# EAGLE board eca84_v1 (EAGLE 9.6.2)
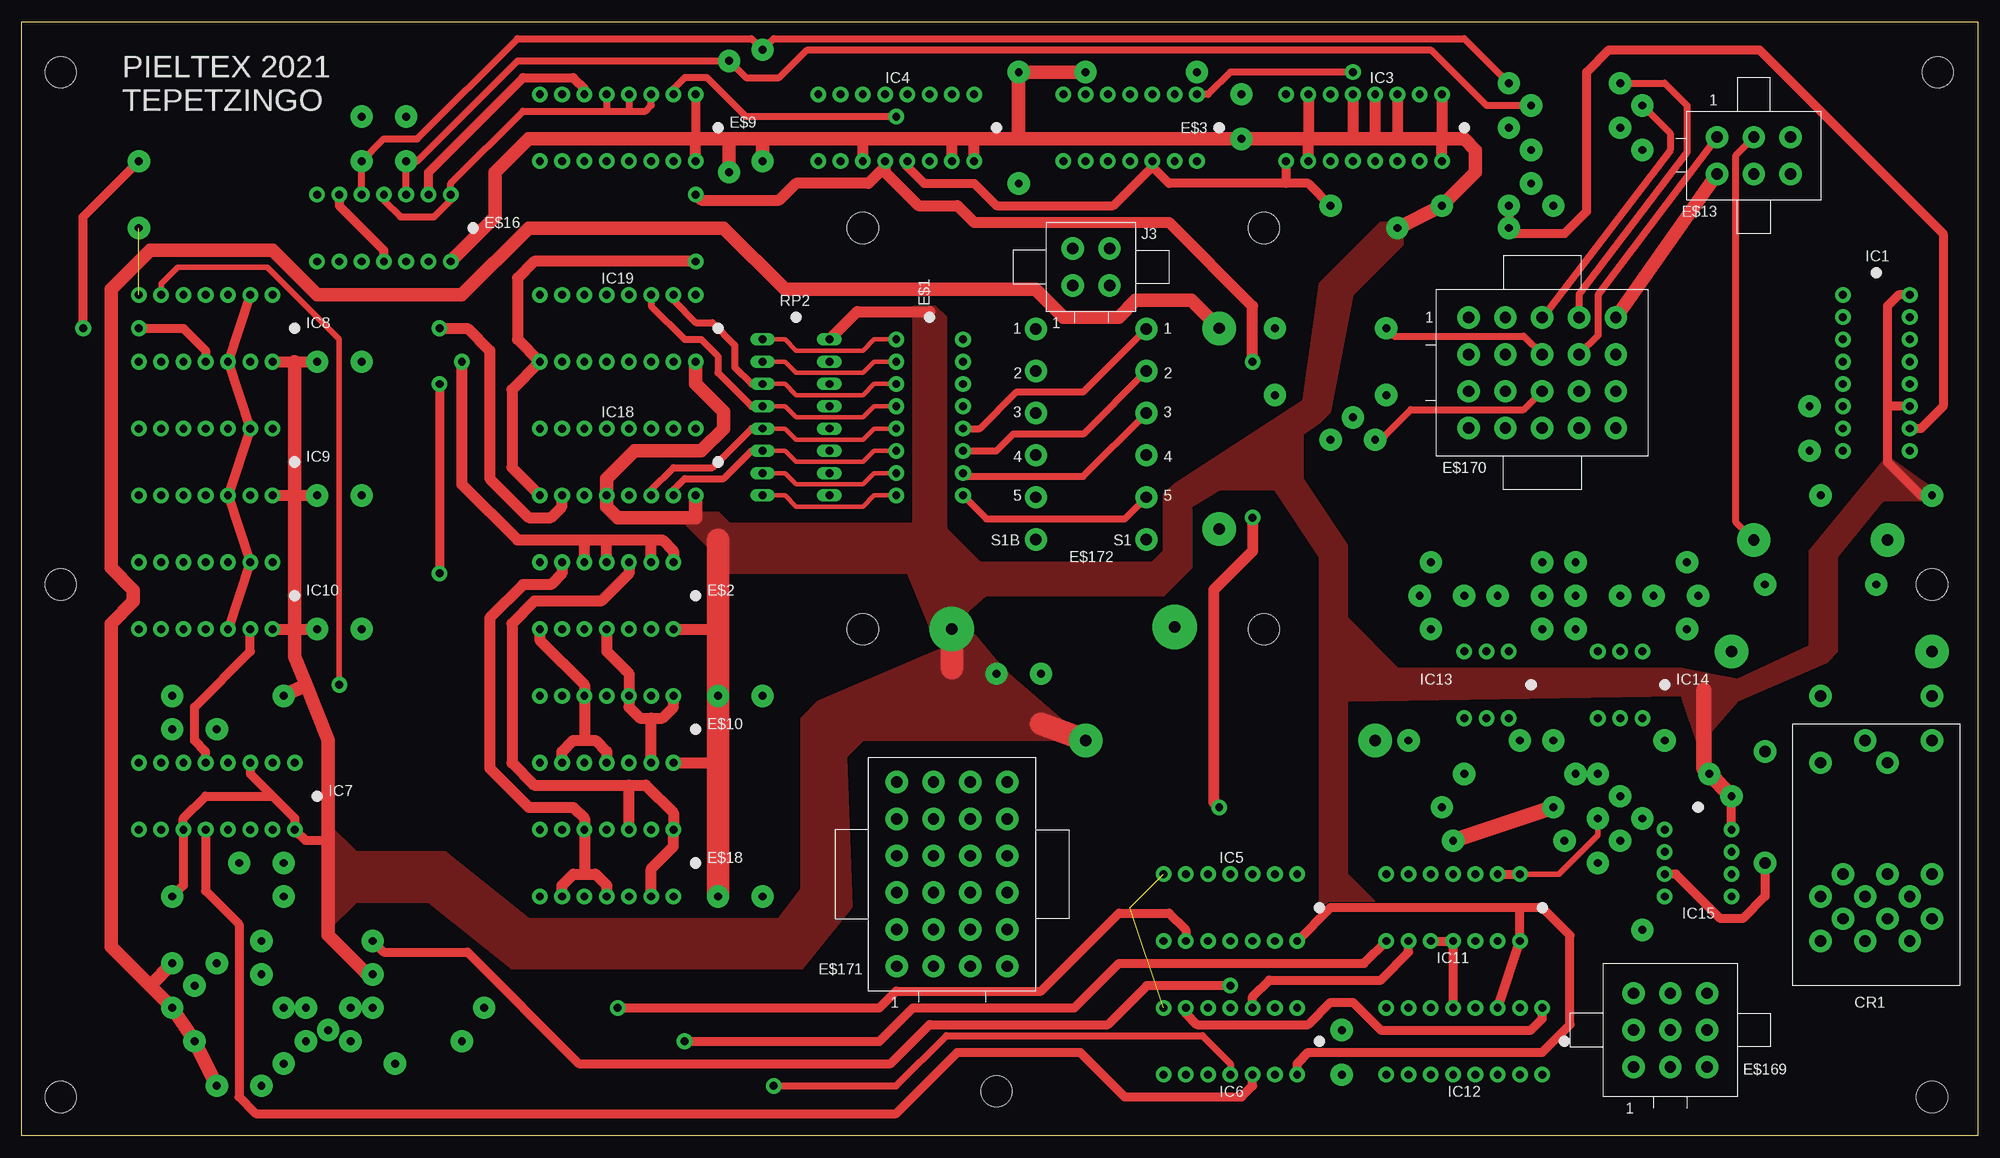
[diagram p0: board, top side]
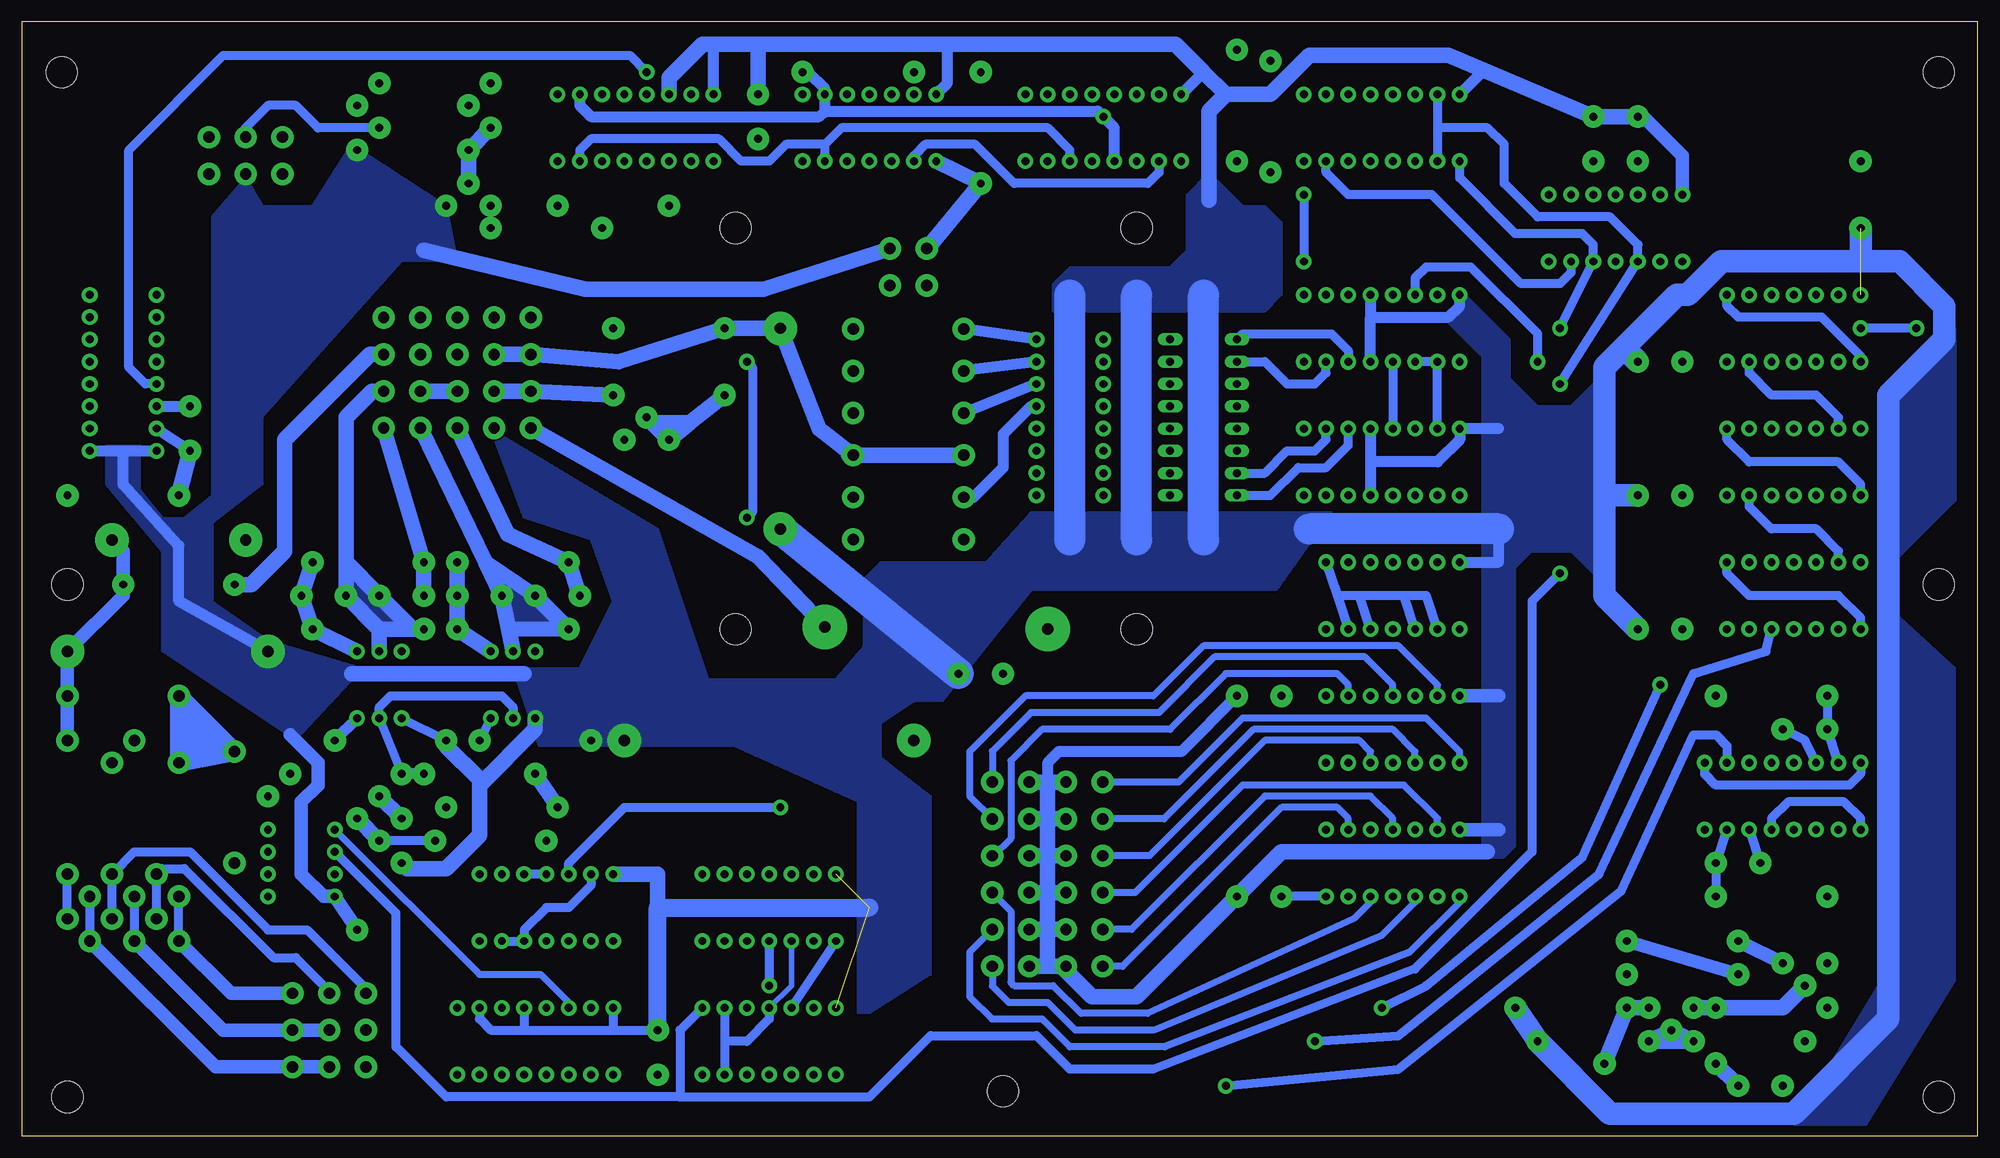
[diagram p1: board, bottom side, seen from below]

Size 223 x 127 mm. Coordinates in mm from the lower left corner, seen from the top.
Outline: 0,127 223,127 223,0 0,0 0,127
Copper layers (1*16): Top 0.035mm / dielectric 1.5mm / Bottom 0.035mm
Design rules "default": minimum track width 6mil, minimum drill 0.35mm, track to track 6mil, track to pad 6mil, pad to pad 6mil, via to via 6mil, smd to smd 6mil, copper to edge 40mil, drill to drill 6mil, minimum pad ring 10mil, minimum via ring 8mil, stop-mask expansion 4mil, vias tented up to drill 0mil, thermal gap 10mil
Holes 3.56 mm at 4.45,121.28 4.45,62.86 4.45,4.44 111.12,5.08 95.89,57.78 141.6,57.78 141.6,103.5 95.89,103.5 218.44,121.28 217.81,62.86 217.81,4.44

## Footprints (pad centres in the part's own frame; a part is rotated, then mirrored left to right if it is on the bottom)
CON-ZIGZAG = drill 1.3 pad 2.54: P$1 -6.35,-11.43; P$2 -1.27,-11.43; P$3 3.81,-11.43; P$4 -3.81,-8.89; P$5 1.27,-8.89; P$6 6.35,-8.89; P$7 -6.35,-6.35; P$8 -1.27,-6.35; P$9 3.81,-6.35; P$10 -3.81,-3.81; P$11 1.27,-3.81; P$12 6.35,-3.81; P$13 -6.35,8.89; P$14 -1.27,11.43; P$15 1.27,8.89; P$16 6.35,11.43
DIL-16 = drill 0.9 pad 1.778: P$1 8.89,3.81; P$2 6.35,3.81; P$3 3.81,3.81; P$4 1.27,3.81; P$5 -1.27,3.81; P$6 -3.81,3.81; P$7 -6.35,3.81; P$8 -8.89,3.81; P$9 -8.89,-3.81; P$10 -6.35,-3.81; P$11 -3.81,-3.81; P$12 -1.27,-3.81; P$13 1.27,-3.81; P$14 3.81,-3.81; P$15 6.35,-3.81; P$16 8.89,-3.81
DIL-14 = drill 0.9 pad 1.778: P$1 7.62,3.81; P$2 5.08,3.81; P$3 2.54,3.81; P$4 0,3.81; P$5 -2.54,3.81; P$6 -5.08,3.81; P$7 -7.62,3.81; P$8 -7.62,-3.81; P$9 -5.08,-3.81; P$10 -2.54,-3.81; P$11 0,-3.81; P$12 2.54,-3.81; P$13 5.08,-3.81; P$14 7.62,-3.81
ROUND-3 = drill 0.9 pad 2.54: P$1 0,0
CON-2X3 = drill 1.3 pad 2.54: P$1 -4.2,2.1; P$2 -4.2,-2.1; P$3 0,2.1; P$4 0,-2.1; P$5 4.2,2.1; P$6 4.2,-2.1
ROUND-5 = drill 1.3 pad 3.81: P$1 0,0
ROUND-6 = drill 1.3 pad 5.08: P$1 0,0
ROUND-1 = drill 0.9 pad 1.778: P$1 0,0
ROUND-4 = drill 1.3 pad 2.54: P$1 0,0
CON-3X3 = drill 1.3 pad 2.54: P$1 -4.2,-4.2; P$2 0,-4.2; P$3 4.2,-4.2; P$4 -4.2,0; P$5 0,0; P$6 4.2,0; P$7 -4.2,4.2; P$8 0,4.2; P$9 4.2,4.2
CON-4X5 = drill 1.3 pad 2.54: P$1 -8.4,6.3; P$2 -8.4,2.1; P$3 -8.4,-2.1; P$4 -8.4,-6.3; P$5 -4.2,6.3; P$6 -4.2,2.1; P$7 -4.2,-2.1; P$8 -4.2,-6.3; P$9 0,6.3; P$10 0,2.1; P$11 0,-2.1; P$12 0,-6.3; P$13 4.2,6.3; P$14 4.2,2.1; P$15 4.2,-2.1; P$16 4.2,-6.3; P$17 8.4,6.3; P$18 8.4,2.1; P$19 8.4,-2.1; P$20 8.4,-6.3
CON-4X6 = drill 1.3 pad 2.54: P$1 -6.3,-10.5; P$2 -2.1,-10.5; P$3 2.1,-10.5; P$4 6.3,-10.5; P$5 -6.3,-6.3; P$6 -2.1,-6.3; P$7 2.1,-6.3; P$8 6.3,-6.3; P$9 -6.3,-2.1; P$10 -2.1,-2.1; P$11 2.1,-2.1; P$12 6.3,-2.1; P$13 -6.3,2.1; P$14 -2.1,2.1; P$15 2.1,2.1; P$16 6.3,2.1; P$17 -6.3,6.3; P$18 -2.1,6.3; P$19 2.1,6.3; P$20 6.3,6.3; P$21 -6.3,10.5; P$22 -2.1,10.5; P$23 2.1,10.5; P$24 6.3,10.5
CON-2X6 = drill 1.3 pad 2.54: P$1 -6.3,12; P$2 6.3,12; P$3 -6.3,7.2; P$4 6.3,7.2; P$5 -6.3,2.4; P$6 6.3,2.4; P$7 -6.3,-2.4; P$8 6.3,-2.4; P$9 -6.3,-7.2; P$10 6.3,-7.2; P$11 -6.3,-12; P$12 6.3,-12
DIL-6 = drill 0.9 pad 1.778: P$1 2.54,3.81; P$2 0,3.81; P$3 -2.54,3.81; P$4 -2.54,-3.81; P$5 0,-3.81; P$6 2.54,-3.81
DIL-8 = drill 0.9 pad 1.778: P$1 3.81,3.81; P$2 1.27,3.81; P$3 -1.27,3.81; P$4 -3.81,3.81; P$5 -3.81,-3.81; P$6 -1.27,-3.81; P$7 1.27,-3.81; P$8 3.81,-3.81
CON-2X2 = drill 1.3 pad 2.54: P$1 -2.1,-2.1; P$2 2.1,-2.1; P$3 -2.1,2.1; P$4 2.1,2.1
DIL-16-LONG = drill 0.9 long: P$1 -3.81,8.89; P$2 -3.81,6.35; P$3 -3.81,3.81; P$4 -3.81,1.27; P$5 -3.81,-1.27; P$6 -3.81,-3.81; P$7 -3.81,-6.35; P$8 -3.81,-8.89; P$9 3.81,-8.89; P$10 3.81,-6.35; P$11 3.81,-3.81; P$12 3.81,-1.27; P$13 3.81,1.27; P$14 3.81,3.81; P$15 3.81,6.35; P$16 3.81,8.89

## Placement (x,y rotation side)
CR1  [CON-ZIGZAG]  211.46,33.65 0 top
E$1  [DIL-16]  103.5,81.91 90 top
E$2  [DIL-14]  66.67,61.59 0 top
E$3  [DIL-14]  126.36,114.93 0 top
E$9  [DIL-16]  67.94,114.93 0 top
E$10  [DIL-14]  66.67,46.35 0 top
E$11  [ROUND-3]  13.34,111.12 0 top
E$12  [ROUND-3]  13.34,103.5 0 top
E$13  [CON-2X3]  197.49,111.76 0 top
E$14  [ROUND-5]  121.28,45.08 0 top
E$15  [ROUND-6]  131.44,58.04 0 top
E$16  [DIL-14]  41.27,103.5 0 top
E$17  [ROUND-1]  13.34,92.07 0 top
E$18  [DIL-14]  66.67,31.11 0 top
E$19  [ROUND-1]  6.99,92.07 0 top
E$20  [ROUND-3]  33.66,88.26 0 top
E$21  [ROUND-3]  38.73,88.26 0 top
E$22  [ROUND-3]  33.66,73.02 0 top
E$23  [ROUND-3]  38.73,73.02 0 top
E$24  [ROUND-3]  33.66,57.78 0 top
E$25  [ROUND-3]  38.73,57.78 0 top
E$26  [ROUND-3]  22.23,46.35 0 top
E$27  [ROUND-3]  17.14,46.35 0 top
E$28  [ROUND-3]  17.14,50.16 0 top
E$29  [ROUND-3]  29.84,50.16 0 top
E$30  [ROUND-3]  24.77,31.11 0 top
E$31  [ROUND-3]  29.84,31.11 0 top
E$32  [ROUND-3]  29.84,27.3 0 top
E$33  [ROUND-3]  17.14,27.3 0 top
E$34  [ROUND-3]  17.14,19.68 0 top
E$35  [ROUND-3]  22.23,19.68 0 top
E$36  [ROUND-3]  19.68,17.14 0 top
E$37  [ROUND-3]  17.14,14.6 0 top
E$38  [ROUND-3]  19.68,10.79 0 top
E$39  [ROUND-3]  22.23,5.71 0 top
E$40  [ROUND-3]  27.3,5.71 0 top
E$41  [ROUND-3]  29.84,8.25 0 top
E$42  [ROUND-3]  29.84,14.6 0 top
E$43  [ROUND-3]  32.38,14.6 0 top
E$44  [ROUND-3]  32.38,10.79 0 top
E$45  [ROUND-3]  34.92,12.06 0 top
E$46  [ROUND-3]  37.47,10.79 0 top
E$47  [ROUND-3]  37.47,14.6 0 top
E$48  [ROUND-3]  40.01,14.6 0 top
E$49  [ROUND-3]  42.55,8.25 0 top
E$50  [ROUND-3]  50.16,10.79 0 top
E$51  [ROUND-3]  52.7,14.6 0 top
E$52  [ROUND-3]  27.3,18.41 0 top
E$53  [ROUND-3]  27.3,22.22 0 top
E$54  [ROUND-3]  40.01,18.41 0 top
E$55  [ROUND-3]  40.01,22.22 0 top
E$56  [ROUND-1]  47.62,64.13 0 top
E$57  [ROUND-1]  47.62,85.72 0 top
E$58  [ROUND-1]  47.62,92.07 0 top
E$59  [ROUND-1]  50.16,88.26 0 top
E$60  [ROUND-1]  76.83,99.69 0 top
E$61  [ROUND-1]  76.83,107.31 0 top
E$62  [ROUND-3]  38.73,111.12 0 top
E$63  [ROUND-3]  43.81,111.12 0 top
E$64  [ROUND-3]  43.81,116.2 0 top
E$65  [ROUND-3]  38.73,116.2 0 top
E$66  [ROUND-3]  80.64,122.55 0 top
E$67  [ROUND-3]  84.45,123.82 0 top
E$68  [ROUND-3]  113.67,121.28 0 top
E$69  [ROUND-3]  121.28,121.28 0 top
E$70  [ROUND-3]  133.99,121.28 0 top
E$71  [ROUND-3]  139.06,118.74 0 top
E$72  [ROUND-3]  169.54,120.01 0 top
E$73  [ROUND-3]  172.09,117.47 0 top
E$74  [ROUND-3]  169.54,114.93 0 top
E$75  [ROUND-3]  172.09,112.39 0 top
E$76  [ROUND-3]  172.09,108.58 0 top
E$77  [ROUND-3]  174.62,106.04 0 top
E$78  [ROUND-3]  169.54,106.04 0 top
E$79  [ROUND-3]  169.54,103.5 0 top
E$80  [ROUND-3]  161.93,106.04 0 top
E$81  [ROUND-3]  156.84,103.5 0 top
E$82  [ROUND-3]  149.22,106.04 0 top
E$83  [ROUND-3]  139.06,113.66 0 top
E$84  [ROUND-3]  142.88,92.07 0 top
E$85  [ROUND-3]  155.57,92.07 0 top
E$86  [ROUND-3]  142.88,84.45 0 top
E$87  [ROUND-3]  155.57,84.45 0 top
E$88  [ROUND-3]  151.76,81.91 0 top
E$89  [ROUND-3]  154.31,79.37 0 top
E$90  [ROUND-3]  149.22,79.37 0 top
E$91  [ROUND-3]  79.38,27.3 0 top
E$92  [ROUND-3]  84.45,27.3 0 top
E$93  [ROUND-3]  79.38,50.16 0 top
E$94  [ROUND-3]  84.45,50.16 0 top
E$95  [ROUND-3]  80.64,109.85 0 top
E$96  [ROUND-3]  84.45,111.12 0 top
E$97  [ROUND-1]  67.94,14.6 0 top
E$98  [ROUND-1]  75.56,10.79 0 top
E$99  [ROUND-1]  85.72,5.71 0 top
E$100  [ROUND-3]  111.12,52.7 0 top
E$102  [ROUND-3]  184.78,23.49 0 top
E$103  [ROUND-3]  179.71,31.11 0 top
E$104  [ROUND-3]  182.25,33.65 0 top
E$105  [ROUND-3]  184.78,36.19 0 top
E$106  [ROUND-3]  179.71,36.19 0 top
E$107  [ROUND-3]  182.25,38.73 0 top
E$108  [ROUND-3]  175.9,33.65 0 top
E$109  [ROUND-3]  174.62,37.46 0 top
E$110  [ROUND-3]  163.19,33.65 0 top
E$111  [ROUND-3]  161.93,37.46 0 top
E$112  [ROUND-3]  164.47,41.27 0 top
E$113  [ROUND-3]  177.16,41.27 0 top
E$114  [ROUND-3]  179.71,41.27 0 top
E$115  [ROUND-3]  174.62,45.08 0 top
E$116  [ROUND-3]  170.81,45.08 0 top
E$117  [ROUND-3]  158.12,45.08 0 top
E$118  [ROUND-3]  160.66,57.78 0 top
E$119  [ROUND-3]  159.38,61.59 0 top
E$120  [ROUND-3]  160.66,65.4 0 top
E$121  [ROUND-3]  164.47,61.59 0 top
E$122  [ROUND-3]  168.28,61.59 0 top
E$123  [ROUND-3]  173.35,61.59 0 top
E$124  [ROUND-3]  177.16,61.59 0 top
E$125  [ROUND-3]  177.16,65.4 0 top
E$126  [ROUND-3]  173.35,65.4 0 top
E$127  [ROUND-3]  173.35,57.78 0 top
E$128  [ROUND-3]  177.16,57.78 0 top
E$129  [ROUND-3]  182.25,61.59 0 top
E$130  [ROUND-3]  186.06,61.59 0 top
E$131  [ROUND-3]  189.87,65.4 0 top
E$132  [ROUND-3]  191.13,61.59 0 top
E$133  [ROUND-3]  189.87,57.78 0 top
E$134  [ROUND-3]  198.75,62.86 0 top
E$135  [ROUND-3]  203.84,78.1 0 top
E$136  [ROUND-3]  203.84,83.18 0 top
E$137  [ROUND-3]  205.1,73.02 0 top
E$138  [ROUND-3]  217.81,73.02 0 top
E$139  [ROUND-3]  211.46,62.86 0 top
E$140  [ROUND-3]  182.25,120.01 0 top
E$141  [ROUND-3]  184.78,117.47 0 top
E$142  [ROUND-3]  182.25,114.93 0 top
E$143  [ROUND-3]  184.78,112.39 0 top
E$144  [ROUND-5]  136.53,92.07 0 top
E$145  [ROUND-1]  36.2,51.43 0 top
E$146  [ROUND-1]  137.79,17.14 0 top
E$147  [ROUND-3]  150.5,12.06 0 top
E$148  [ROUND-3]  150.5,6.98 0 top
E$149  [ROUND-1]  99.69,116.2 0 top
E$150  [ROUND-1]  140.34,88.26 0 top
E$151  [ROUND-1]  151.76,121.28 0 top
E$152  [ROUND-3]  192.41,41.27 0 top
E$153  [ROUND-3]  194.94,38.73 0 top
E$154  [ROUND-3]  187.32,45.08 0 top
E$155  [ROUND-4]  198.75,31.11 0 top
E$156  [ROUND-4]  198.75,43.81 0 top
E$157  [ROUND-4]  205.1,50.16 0 top
E$158  [ROUND-4]  217.81,50.16 0 top
E$159  [ROUND-5]  217.81,55.24 0 top
E$160  [ROUND-5]  212.72,67.94 0 top
E$161  [ROUND-5]  194.94,55.24 0 top
E$162  [ROUND-5]  197.49,67.94 0 top
E$163  [ROUND-5]  154.31,45.08 0 top
E$164  [ROUND-1]  140.34,70.48 0 top
E$165  [ROUND-1]  136.53,37.46 0 top
E$166  [ROUND-5]  136.53,69.21 0 top
E$167  [ROUND-6]  106.05,57.78 0 top
E$168  [ROUND-3]  113.67,108.58 0 top
E$169  [CON-3X3]  187.96,12.06 0 top
E$170  [CON-4X5]  173.35,86.99 0 top
E$171  [CON-4X6]  106.05,29.84 0 top
E$172  [CON-2X6]  121.92,80.01 0 top
GND  [ROUND-3]  116.2,52.7 0 top
IC1  [DIL-16]  211.46,86.99 90 top
IC3  [DIL-16]  153.03,114.93 0 top
IC4  [DIL-16]  99.69,114.93 0 top
IC5  [DIL-14]  137.79,26.03 0 top
IC6  [DIL-14]  137.79,10.79 0 top
IC7  [DIL-16]  22.23,38.73 0 top
IC8  [DIL-14]  20.95,92.07 0 top
IC9  [DIL-14]  20.95,76.83 0 top
IC10  [DIL-14]  20.95,61.59 0 top
IC11  [DIL-14]  163.19,26.03 0 top
IC12  [DIL-16]  164.47,10.79 0 top
IC13  [DIL-6]  167,51.43 0 top
IC14  [DIL-6]  182.25,51.43 0 top
IC15  [DIL-8]  191.13,31.11 90 top
IC18  [DIL-16]  67.94,76.83 0 top
IC19  [DIL-16]  67.94,92.07 0 top
J3  [CON-2X2]  121.92,99.06 0 top
RP2  [DIL-16-LONG]  88.27,81.91 0 top

## Library data of the parts
CR1 E$1-E$3 E$9-E$100 E$102-E$172 GND IC1 IC3-IC15 IC18 IC19 J3 RP2 = eca84

## Nets
GND: E$2.P$7 E$3.P$7 E$9.P$8 E$10.P$7 E$12.P$1 E$13.P$4 E$16.P$7 E$18.P$7 E$21.P$1 E$23.P$1 E$25.P$1 E$50.P$1 E$51.P$1 E$64.P$1 E$65.P$1 E$71.P$1 E$77.P$1 E$92.P$1 E$94.P$1 E$102.P$1 E$103.P$1 E$115.P$1 E$117.P$1 E$143.P$1 E$147.P$1 E$161.P$1 E$163.P$1 E$166.P$1 E$171.P$2 E$171.P$3 E$171.P$6 E$171.P$7 E$171.P$10 E$171.P$11 E$171.P$14 E$171.P$15 E$171.P$18 E$171.P$19 E$171.P$22 E$171.P$23 GND.P$1 IC1.P$8 IC1.P$9 IC3.P$6 IC3.P$8 IC4.P$8 IC5.P$7 IC6.P$7 IC8.P$7 IC11.P$7 IC12.P$2 IC12.P$4 IC12.P$8 IC13.P$4 IC14.P$4 IC15.P$4 IC18.P$4 IC18.P$8 IC18.P$13 IC19.P$4 IC19.P$8 IC19.P$13 J3.P$4
GRUPO1: E$118.P$1 E$121.P$1 E$122.P$1 E$170.P$16 IC13.P$2
GRUPO2: E$128.P$1 E$129.P$1 E$130.P$1 E$170.P$19 IC14.P$2
S$1: E$2.P$11 E$10.P$1 E$10.P$3 E$10.P$13
S$2: E$11.P$1 E$17.P$1 E$19.P$1 IC8.P$11
S$3: E$3.P$13 IC3.P$15 IC4.P$14
S$4: E$16.P$6 E$16.P$11
S$5: E$97.P$1 E$145.P$1 IC5.P$9 IC8.P$6
S$6: IC7.P$5 IC10.P$13
S$7: E$52.P$1 E$55.P$1 E$146.P$1 IC5.P$11
S$8: IC8.P$1 IC8.P$8
S$9: E$99.P$1 IC6.P$11 IC7.P$2
S$10: IC6.P$12 IC7.P$12
S$11: E$36.P$1 E$42.P$1 E$43.P$1
S$12: E$47.P$1 E$48.P$1 E$49.P$1
S$13: E$86.P$1 E$88.P$1 E$90.P$1
S$14: CR1.P$3 CR1.P$9 E$169.P$2 E$169.P$3
S$15: E$16.P$5 E$62.P$1 E$67.P$1 E$72.P$1
S$16: E$16.P$3 E$63.P$1 E$66.P$1 E$73.P$1
S$17: E$9.P$6 E$16.P$2
S$18: E$9.P$3 E$9.P$4 E$9.P$5 E$16.P$1 E$16.P$4
S$19: IC18.P$7 IC19.P$10 IC19.P$11
S$20: E$74.P$1 E$75.P$1 E$76.P$1
S$21: IC5.P$10 IC6.P$2 IC6.P$4 IC6.P$13
S$22: E$2.P$1 E$2.P$2 E$2.P$4 E$2.P$5 E$2.P$9 E$2.P$10 E$2.P$12 E$2.P$13 E$59.P$1 IC19.P$6
S$23: E$3.P$12 E$82.P$1 IC3.P$9 IC4.P$13
S$24: E$9.P$9 E$16.P$12 E$58.P$1 IC18.P$10
S$25: IC5.P$8 IC6.P$5
S$26: E$1.P$3 IC19.P$2 RP2.P$3
S$27: E$1.P$4 IC19.P$3 RP2.P$4
S$28: E$1.P$6 IC18.P$15 RP2.P$6
S$29: E$1.P$7 IC18.P$2 RP2.P$7
S$30: IC8.P$13 IC9.P$6
S$31: E$1.P$1 IC19.P$14 RP2.P$1
S$32: E$1.P$2 IC19.P$15 RP2.P$2
S$33: E$1.P$5 IC18.P$14 RP2.P$5
S$34: E$1.P$8 IC18.P$3 RP2.P$8
S$35: E$98.P$1 IC8.P$2 IC8.P$12 IC9.P$2 IC9.P$12 IC10.P$2 IC10.P$12 IC11.P$8
S$36: E$1.P$12 E$172.P$2
S$37: E$2.P$8 E$10.P$5 E$10.P$9 E$10.P$11
S$38: E$2.P$6 E$18.P$5 E$18.P$9 E$18.P$11
S$39: IC6.P$3 IC11.P$9
S$40: E$2.P$3 E$18.P$1 E$18.P$3 E$18.P$13
S$41: IC18.P$5 IC19.P$12
S$42: E$3.P$1 E$151.P$1 IC1.P$5
S$43: E$78.P$1 E$79.P$1 IC1.P$10
S$44: IC6.P$6 IC12.P$1
S$45: IC5.P$14 IC6.P$14 IC11.P$14 IC12.P$3
S$46: IC11.P$10 IC11.P$11 IC12.P$5
S$47: E$155.P$1 IC15.P$3
S$48: IC9.P$1 IC9.P$8
S$49: E$106.P$1 E$107.P$1 IC11.P$1 IC11.P$2
S$50: E$109.P$1 E$110.P$1
S$52: IC9.P$13 IC10.P$6
S$53: IC10.P$1 IC10.P$8
S$54: E$27.P$1 E$28.P$1 IC7.P$7
S$55: E$26.P$1 IC7.P$6
S$56: IC7.P$9 IC7.P$13
S$57: IC7.P$1 IC7.P$8
S$58: E$30.P$1 IC7.P$14
S$59: E$31.P$1 E$32.P$1 IC7.P$15
S$60: E$35.P$1 E$53.P$1
S$61: E$44.P$1 E$45.P$1 E$46.P$1
S$62: E$40.P$1 E$41.P$1
S$65: E$3.P$2 E$9.P$2 E$60.P$1 E$61.P$1 E$70.P$1 E$149.P$1 E$150.P$1 E$164.P$1 E$165.P$1 IC3.P$2 IC4.P$12 IC11.P$5 IC18.P$9 IC19.P$9
S$66: E$3.P$9 IC4.P$10
S$67: E$3.P$8 E$168.P$1 J3.P$3
S$68: E$9.P$15 E$16.P$13
S$69: E$18.P$8 E$171.P$8
S$70: E$1.P$11 E$172.P$4
S$71: E$1.P$10 E$172.P$6
S$72: E$1.P$9 E$172.P$10
S$73: E$141.P$1 E$170.P$9
S$74: E$140.P$1 E$170.P$13
S$75: E$13.P$2 E$170.P$17
S$76: E$13.P$1 E$170.P$14
S$77: E$85.P$1 E$170.P$10
S$78: E$89.P$1 E$170.P$11 E$170.P$15
S$79: E$13.P$3 E$142.P$1 E$162.P$1
S$80: E$10.P$6 E$171.P$20
S$81: E$10.P$4 E$171.P$24
S$82: E$10.P$2 E$171.P$16
S$83: E$10.P$10 E$171.P$17
S$84: E$10.P$12 E$171.P$13
S$85: E$10.P$8 E$171.P$21
S$86: IC12.P$6 IC15.P$1
S$87: E$18.P$6 E$171.P$9
S$88: E$18.P$4 E$171.P$5
S$89: E$18.P$2 E$171.P$1
S$90: E$18.P$10 E$171.P$4
S$91: E$18.P$12 E$171.P$12
S$92: E$9.P$7 E$9.P$10 E$16.P$10 E$56.P$1 E$57.P$1 IC6.P$1 IC15.P$2
S$93: IC11.P$6 IC11.P$12 IC11.P$13
S$94: IC11.P$3 IC11.P$4
S$95: CR1.P$6 CR1.P$12
S$96: E$116.P$1 IC13.P$6
S$97: E$136.P$1 IC1.P$6
S$98: E$113.P$1 E$114.P$1 IC13.P$5 IC14.P$5
S$99: E$154.P$1 IC14.P$6
S$100: E$104.P$1 E$105.P$1 E$108.P$1
S$101: E$111.P$1 E$112.P$1
S$102: CR1.P$5 CR1.P$11 E$169.P$7
S$103: CR1.P$2 CR1.P$8 E$169.P$5 E$169.P$6
S$104: CR1.P$1 CR1.P$7 E$169.P$9
S$105: CR1.P$4 CR1.P$10 E$169.P$8
S$106: CR1.P$16 E$139.P$1 E$158.P$1 E$159.P$1 E$160.P$1
S$107: CR1.P$13 E$156.P$1 E$157.P$1
S$109: E$135.P$1 E$137.P$1 IC1.P$7
S$110: E$134.P$1 E$170.P$18
S$111: E$131.P$1 E$132.P$1 E$133.P$1 IC14.P$1
S$112: E$123.P$1 E$126.P$1 E$127.P$1 IC13.P$1
S$113: E$119.P$1 E$120.P$1 E$170.P$12
S$114: E$34.P$1 E$37.P$1 E$38.P$1 E$39.P$1 E$84.P$1 E$144.P$1 E$170.P$2 E$170.P$6 E$172.P$7 E$172.P$8
S$115: E$1.P$16 E$172.P$1
S$116: E$1.P$15 E$172.P$3
S$117: E$1.P$14 E$172.P$5
S$118: E$1.P$13 E$172.P$9
S$119: E$15.P$1 E$170.P$4
S$121: E$124.P$1 E$125.P$1 E$170.P$20
S$122: E$87.P$1 E$170.P$3 E$170.P$7
VCC: E$2.P$14 E$9.P$1 E$9.P$16 E$10.P$14 E$14.P$1 E$16.P$14 E$18.P$14 E$20.P$1 E$22.P$1 E$24.P$1 E$29.P$1 E$33.P$1 E$54.P$1 E$68.P$1 E$69.P$1 E$80.P$1 E$81.P$1 E$83.P$1 E$91.P$1 E$93.P$1 E$95.P$1 E$96.P$1 E$100.P$1 E$138.P$1 E$152.P$1 E$153.P$1 E$167.P$1 IC1.P$11 IC1.P$16 IC3.P$1 IC3.P$3 IC3.P$4 IC3.P$5 IC3.P$7 IC3.P$10 IC3.P$16 IC4.P$11 IC4.P$15 IC4.P$16 IC7.P$3 IC7.P$11 IC7.P$16 IC8.P$14 IC9.P$14 IC10.P$14 IC15.P$8 IC18.P$12 IC18.P$16 IC19.P$16 RP2.P$16

## Tracks (layer width: path | path; a pad name or v marks a point on that pad's centre or on a via)
GND  (3 unrouted)
  Bottom 1.016: IC14.P$4 E$115.P$1 | IC12.P$2 170.81,13.33 169.54,12.06 165.74,12.06 | 165.74,12.06 155.57,12.06 | 155.57,12.06 E$147.P$1 | IC12.P$4 165.74,12.06 | IC12.P$8 155.57,12.06
  Bottom 1.27: E$2.P$7 54.61,65.4 54.61,69.21 | E$94.P$1 90.81,43.81 104.78,43.81 106.05,42.54 106.05,40.34 | IC1.P$9 211.46,78.1 | 211.46,78.1 IC1.P$8 | E$9.P$8 56.49,121.31 55.87,121.31 | IC3.P$8 144.15,124.46 | E$3.P$7 117.47,120.01 117.47,124.46 | IC4.P$8 88.27,121.28 | IC19.P$8 59.05,94.61 60.33,93.34 69.22,93.34 | IC19.P$4 69.22,93.34 | IC19.P$13 69.22,93.34 | IC18.P$4 69.22,76.83 | 69.22,76.83 IC18.P$13 | 69.22,76.83 61.59,76.83 59.05,79.37 IC18.P$8 54.61,80.64 | E$161.P$1 205.1,60.96 205.1,67.31 211.46,74.29 211.46,78.1
  Bottom 1.524: E$10.P$7 54.61,50.16 | E$18.P$7 54.61,34.92 | E$102.P$1 IC15.P$4 188.59,27.3 191.13,29.84 191.13,38.1 189.23,40 189.23,42.54 192.41,45.72 | E$16.P$7 33.66,111.76 38.1,116.2 E$65.P$1
  Bottom 1.778: 55.88,32.38 79.38,32.38 E$92.P$1 95.89,15.87 100.97,15.87 103.94,18.85 E$171.P$2 106.05,19.34 | E$171.P$22 106.05,40.34 | E$171.P$23 106.05,40.34 | E$171.P$18 106.05,36.14 | E$171.P$19 106.05,36.14 | 106.05,19.34 E$171.P$3 | E$171.P$6 106.05,23.54 | E$171.P$7 106.05,23.54 | E$171.P$10 106.05,27.74 | E$171.P$11 106.05,27.74 | E$171.P$15 106.05,31.94 | E$171.P$14 106.05,31.94 | 106.05,40.34 106.05,36.14 | 106.05,36.14 106.05,31.94 | 106.05,31.94 106.05,27.74 | 106.05,27.74 106.05,23.54 | 106.05,23.54 106.05,19.34 | IC11.P$7 150.5,29.84 150.5,26.03 | E$65.P$1 E$64.P$1 55.87,121.31 60.33,123.19 76.2,123.19 80.64,118.74 85.72,118.74 | 85.72,118.74 88.27,121.28 91.44,124.46 117.47,124.46 139.06,124.46 | 139.06,124.46 144.15,124.46 145.41,124.46 149.22,120.65 IC3.P$6 | E$71.P$1 139.06,124.46 | 85.72,118.74 87.63,116.84 87.63,106.68 | 165.74,52.7 185.42,52.7 | E$103.P$1 179.07,30.48 174.62,30.48 170.81,34.29 170.81,40 | 170.81,40 170.81,40.64 174.62,44.45 E$115.P$1 | 170.81,40 164.47,46.35 IC13.P$4 | J3.P$4 138.43,96.52 158.75,96.52 177.16,100.96
  Bottom 2.032: E$147.P$1 150.5,26.03 126.36,26.03
  Bottom 2.54: E$25.P$1 42.55,61.59 42.55,73.02 | 42.55,73.02 E$23.P$1 | 42.55,73.02 42.55,87.63 40.32,89.85 | 40.32,89.85 34.29,95.88 33.02,95.88 29.21,99.69 13.34,99.69 | E$12.P$1 13.34,99.69 | E$21.P$1 40.32,89.85 | 13.34,99.69 8.89,99.69 3.81,94.61 3.81,90.8 10.16,84.45 10.16,13.33 20.95,2.54 41.91,2.54 E$50.P$1 E$51.P$1
  Bottom 3.556: 54.61,69.21 76.2,69.21 | 88.27,67.94 88.27,95.88 | 95.89,67.94 95.89,95.88 | 103.5,67.94 103.5,95.88 | E$166.P$1 GND.P$1
  pour Bottom (no thermals): 41.91,87.63 46.35,83.18 50.16,83.18 53.34,86.36 53.34,90.8 58.42,95.88 60.96,93.34 56.52,88.9 56.52,31.75 53.98,31.75 52.7,33.02 52.7,64.77 50.8,66.67 46.35,66.67 41.91,62.23
  pour Bottom: 2.54,72.39 10.16,64.77 10.16,84.45 2.54,92.07
  pour Bottom: 10.16,60.32 10.16,18.67 10.16,18.67
  pour Bottom: 10.16,60.32 10.16,19.05 20.95,1.27 12.7,1.27 2.54,17.78 2.54,53.34
  pour Bottom (no thermals): 127.64,13.97 127.64,38.1 141.75,44.45 164.04,44.45 167,53.34 159.38,53.34 155.57,60.96 158.12,67.94 165.74,70.48 169.54,80.64 150.5,69.21 144.78,52.07 130.18,52.07 127,55.77 127,63.5 125.09,65.4 113.09,65.4 107.95,71.12 73.66,71.12 80.01,62.23 107.95,62.23 118.11,49.53 121.28,49.53 125.09,46.99 125.09,43.18 119.38,38.73 119.38,18.41 126.36,13.97
  pour Bottom: 81.28,93.98 105.41,93.98 105.41,97.15 103.5,99.06 92.08,99.06 90.17,100.96 90.17,107.31 87.63,109.85 83.82,106.04 81.28,106.04 79.38,104.14 79.38,95.88
  pour Bottom (no thermals): 197.49,109.22 195.58,106.04 189.87,106.04 185.42,113.03 174.62,106.04 173.35,99.69 179.71,99.69 195.58,81.91 195.58,74.29 201.29,69.85 201.29,60.96 194.94,56.51 184.15,53.34 191.77,45.08 207.01,55.24 207.01,66.67 213.36,74.29 213.36,78.74 209.55,78.74 209.55,73.66 207.01,70.48 204.47,70.48 201.29,73.02 201.29,104.77
GRUPO1
  Bottom 1.778: E$170.P$16 170.14,65.43 | 170.14,65.43 E$122.P$1 167.52,57.81 | 167.52,57.81 IC13.P$2 | 167.52,57.81 E$118.P$1 E$121.P$1 170.14,65.43
  pour Bottom (no thermals): 161.93,58.42 168.28,64.13 167,58.42
GRUPO2
  Bottom 1.778: E$170.P$19 183.07,84.89 186.06,81.91 186.06,65.4 | 186.06,65.4 E$130.P$1 182.25,57.78 | IC14.P$2 182.25,57.78 | 178.44,57.78 E$129.P$1 186.06,65.4 | 178.44,57.78 E$128.P$1 | 182.25,57.78 178.44,57.78
  pour Bottom (no thermals): 179.71,58.42 185.42,64.13 185.42,61.59 182.25,58.42
S$1
  Top 1.27: E$2.P$11 66.67,55.24 69.22,52.7 E$10.P$3 69.22,48.89 70.48,47.62 71.75,47.62 | E$10.P$1 74.3,48.89 73.03,47.62 71.75,47.62 | E$10.P$13 71.75,47.62
S$2
  Top 1.016: E$19.P$1 6.99,104.77 E$11.P$1 | E$17.P$1 18.41,92.07 20.95,89.53 IC8.P$11
  Bottom 1.016: E$19.P$1 E$17.P$1
S$3
  Bottom 1.016: IC4.P$14 103.5,112.39 106.02,114.91 129.56,114.91 131.44,113.03 | 131.44,113.03 135.89,113.03 137.79,111.12 140.97,111.12 143.51,113.66 158.12,113.66 159.38,112.39 IC3.P$15 | E$3.P$13 131.44,113.03
S$4
  Top 1.016: E$16.P$6 36.2,106.04 41.27,100.96 E$16.P$11
S$5
  Top 0.61: IC8.P$6 15.88,97.15 17.78,99.06 27.94,99.06 36.2,90.8 E$145.P$1
  Top 1.016: E$97.P$1 97.79,14.6 99.69,16.51 116.2,16.51 125.09,25.4 130.81,25.4 132.72,23.49 IC5.P$9
  Bottom 1.016: E$97.P$1 62.87,17.14 45.09,31.75 E$145.P$1
S$6
  Top 1.016: IC7.P$5 20.95,43.81 19.68,45.08 19.68,48.89 26.04,55.24 IC10.P$13
S$7
  Top 1.016: E$55.P$1 41.27,20.95 50.8,20.95 63.5,8.25 99.06,8.25 103.5,12.7 123.83,12.7 128.27,17.14 E$146.P$1
  Bottom 1.016: IC5.P$11 E$146.P$1
  Bottom 1.524: E$52.P$1 E$55.P$1
S$8
  Bottom 1.016: IC8.P$8 13.34,88.9 17.78,93.34 27.3,93.34 28.57,94.61 IC8.P$1
S$9
  Top 0.813: E$99.P$1 99.69,5.71 105.41,11.43 134.62,11.43 137.79,8.25 IC6.P$11
  Bottom 1.016: E$99.P$1 66.04,7.62 40.64,27.94 32.38,45.72 29.84,45.72 28.57,44.45 IC7.P$2
S$10
  Top 1.016: IC7.P$12 20.95,27.94 24.77,24.13 24.77,4.44 26.67,2.54 99.69,2.54 106.68,9.52 120.65,9.52 125.73,4.44 139.06,4.44 140.34,5.71 IC6.P$12
S$11
  Bottom 1.778: E$43.P$1 E$42.P$1 22.23,14.6 E$36.P$1
S$12
  Bottom 1.778: E$47.P$1 E$48.P$1 E$49.P$1
S$13
  Bottom 1.778: E$86.P$1 146.84,81.28 | 146.84,81.28 E$90.P$1 E$88.P$1 151.13,81.28 146.84,81.28
S$14
  Bottom 1.016: CR1.P$9 CR1.P$3
  Bottom 1.524: E$169.P$2 E$169.P$3 200.91,7.86 CR1.P$3
S$15
  Top 0.813: E$16.P$5 E$62.P$1 41.27,113.66 45.09,113.66 56.52,125.09 83.19,125.09 E$67.P$1 85.72,125.09 164.47,125.09 E$72.P$1
S$16
  Top 0.813: E$16.P$3 E$63.P$1 45.09,111.12 56.52,122.55 E$66.P$1 82.55,120.65 86.36,120.65 89.53,123.82 160.66,123.82 167,117.47 E$73.P$1
S$17
  Top 1.016: E$16.P$2 46.35,109.85 57.15,120.65 62.87,120.65 64.14,119.38 E$9.P$6
S$18
  Top 0.813: E$16.P$4 41.27,106.68 43.18,104.77 46.99,104.77 48.9,106.68 E$16.P$1 48.9,108.58 57.15,116.84 66.67,116.84 | 66.67,116.84 69.22,116.84 | 69.22,116.84 71.12,116.84 71.75,117.47 E$9.P$3 | E$9.P$4 69.22,116.84 | E$9.P$5 66.67,116.84
S$19
  Bottom 1.016: IC18.P$7 IC19.P$10 IC19.P$11
S$20
  Bottom 1.778: E$74.P$1 E$75.P$1 E$76.P$1
S$21
  Bottom 0.61: IC6.P$4 135.25,17.14 IC5.P$10
  Bottom 1.016: IC6.P$2 142.88,10.79 | 142.88,10.79 IC6.P$13 | IC6.P$4 137.79,13.33 140.34,10.79 142.88,10.79
S$22
  Top 1.27: E$59.P$1 50.16,74.29 56.52,67.94 64.14,67.94 | 64.14,67.94 66.67,67.94 | 66.67,67.94 71.75,67.94 | 71.75,67.94 73.03,67.94 74.3,66.67 E$2.P$1 | E$2.P$2 71.75,67.94 | E$2.P$4 66.67,67.94 | E$2.P$5 64.14,67.94
  Bottom 1.016: E$2.P$1 73.03,61.59 | 73.03,61.59 E$2.P$13 | E$2.P$9 62.87,61.59 65.41,61.59 | 65.41,61.59 70.48,61.59 | 70.48,61.59 73.03,61.59 | E$2.P$10 65.41,61.59 | E$2.P$12 70.48,61.59 | E$59.P$1 50.16,91.44 57.78,99.06 62.87,99.06 64.14,97.79 IC19.P$6
S$23
  Top 1.016: IC3.P$9 144.15,108.58 | 144.15,108.58 130.81,108.58 128.91,110.49 | IC4.P$13 100.97,110.49 102.87,108.58 108.58,108.58 111.12,106.04 124.46,106.04 128.91,110.49 | 128.91,110.49 E$3.P$12 | E$82.P$1 146.69,108.58 144.15,108.58
S$24
  Top 1.27: E$58.P$1 50.8,92.07 53.34,89.53 53.34,74.93 57.78,70.48 60.33,70.48 61.59,71.75 IC18.P$10
  Bottom 1.016: E$9.P$9 59.05,109.22 52.7,102.87 45.09,102.87 43.81,101.6 E$16.P$12 E$58.P$1
S$25
  Bottom 1.016: IC5.P$8 IC6.P$5
S$26
  Top 0.508: RP2.P$3 87,85.72 88.27,84.45 95.89,84.45 97.16,85.72 E$1.P$3
  Top 0.813: IC19.P$2 74.3,95.25 76.83,92.71 78.74,92.71 81.28,90.17 81.28,87.63 83.19,85.72 RP2.P$3
S$27
  Top 0.508: RP2.P$4 87,83.18 88.27,81.91 95.89,81.91 97.16,83.18 E$1.P$4
  Top 0.813: IC19.P$3 71.75,94.61 75.56,90.8 77.47,90.8 79.38,88.9 79.38,86.99 83.19,83.18 RP2.P$4
S$28
  Top 0.508: RP2.P$6 87,78.1 88.27,76.83 95.89,76.83 97.16,78.1 E$1.P$6
  Top 0.813: IC18.P$15 74.3,73.66 75.56,74.93 80.01,74.93 83.19,78.1 RP2.P$6
S$29
  Top 0.508: E$1.P$7 97.16,75.56 95.89,74.29 88.27,74.29 87,75.56 RP2.P$7
  Bottom 1.016: IC18.P$2 74.3,79.37 75.56,78.1 78.74,78.1 81.28,75.56 RP2.P$7
S$30
  Bottom 1.016: IC9.P$6 15.88,81.91 18.41,84.45 23.5,84.45 26.04,86.99 IC8.P$13
S$31
  Top 0.508: RP2.P$1 87,90.8 88.27,89.53 95.89,89.53 97.16,90.8 E$1.P$1
  Bottom 1.016: RP2.P$1 83.82,91.44 73.66,91.44 71.75,89.53 IC19.P$14
S$32
  Top 0.508: RP2.P$2 87,88.26 88.27,86.99 95.89,86.99 97.16,88.26 E$1.P$2
  Bottom 1.016: IC19.P$15 74.3,86.99 75.56,85.72 78.74,85.72 81.28,88.26 RP2.P$2
S$33
  Top 0.508: E$1.P$5 97.16,80.64 95.89,79.37 88.27,79.37 87,80.64 RP2.P$5
  Top 0.813: IC18.P$14 71.75,73.66 74.3,76.2 78.74,76.2 83.19,80.64 RP2.P$5
S$34
  Top 0.508: RP2.P$8 87,73.02 88.27,71.75 95.89,71.75 97.16,73.02 E$1.P$8
  Bottom 1.016: RP2.P$8 80.64,73.02 77.47,76.2 74.3,76.2 71.75,78.74 IC18.P$3
S$35
  Top 1.016: E$98.P$1 97.79,10.79 101.6,14.6 120.02,14.6 125.09,19.68 153.03,19.68 IC11.P$8 | IC8.P$2 IC8.P$12 IC9.P$2 IC9.P$12 IC10.P$2 IC10.P$12
  Bottom 1.016: E$98.P$1 66.04,11.43 43.18,29.84 32.38,52.7 24.13,55.24 IC10.P$12
S$36
  Top 0.813: E$172.P$2 121.05,84.84 113.41,84.84 109.22,80.64 E$1.P$12
S$37
  Top 1.27: E$10.P$9 61.59,43.81 62.87,45.08 64.14,45.08 | E$2.P$8 59.05,56.51 64.14,51.43 E$10.P$5 64.14,45.08 | 64.14,45.08 65.41,45.08 66.67,43.81 E$10.P$11
S$38
  Top 1.27: E$2.P$6 61.59,64.13 60.33,62.86 57.15,62.86 53.34,59.05 53.34,41.91 57.78,37.46 62.87,37.46 64.14,36.19 E$18.P$5 64.14,29.84 | E$18.P$9 61.59,28.57 62.87,29.84 64.14,29.84 | 64.14,29.84 65.41,29.84 66.67,28.57 E$18.P$11
S$39
  Top 1.016: IC6.P$3 140.34,15.87 142.24,17.78 154.94,17.78 158.12,20.95 IC11.P$9
S$40
  Top 1.27: E$18.P$13 71.75,30.48 74.3,33.02 E$18.P$1 74.3,36.83 71.12,40 69.22,40 | E$2.P$3 69.22,64.13 66.04,60.96 58.42,60.96 55.88,58.42 55.88,42.54 58.42,40 69.22,40 | E$18.P$3 69.22,40
S$41
  Bottom 1.016: IC19.P$12 IC18.P$5
S$42
  Top 0.813: E$151.P$1 137.79,121.28 135.25,118.74 E$3.P$1
  Bottom 1.016: IC1.P$5 208.91,85.72 210.82,87.63 210.82,112.39 200.03,123.19 153.67,123.19 E$151.P$1
S$43
  Top 1.016: E$78.P$1 E$79.P$1 170.18,102.87 175.9,102.87 178.44,105.41 178.44,121.28 180.97,123.82 198.12,123.82 219.07,102.87 219.07,83.18 216.53,80.64 IC1.P$10
S$44
  Top 1.016: IC6.P$6 132.72,13.97 133.99,12.7 146.69,12.7 149.22,15.24 151.76,15.24 154.94,12.06 172.09,12.06 173.35,13.33 IC12.P$1
S$45
  Top 1.016: IC6.P$14 145.41,8.25 146.69,9.52 173.35,9.52 176.53,12.7 176.53,22.86 173.35,26.03 170.81,26.03 | 170.81,26.03 149.22,26.03 IC5.P$14 | 170.81,26.03 IC11.P$14 IC12.P$3
S$46
  Top 1.016: IC11.P$10 IC11.P$11 IC12.P$5
S$47
  Top 1.016: E$155.P$1 198.75,27.3 196.22,24.76 193.68,24.76 188.59,29.84 IC15.P$3
S$48
  Bottom 1.016: IC9.P$8 13.34,74.29 15.88,76.83 26.04,76.83 28.57,79.37 IC9.P$1
S$49
  Top 0.61: E$106.P$1 179.71,34.29 175.26,29.84 IC11.P$1
  Top 1.016: IC11.P$2 IC11.P$1
  Bottom 1.778: E$106.P$1 E$107.P$1
S$50
  Top 1.778: E$110.P$1 E$109.P$1
S$52
  Bottom 1.016: IC10.P$6 15.88,66.67 18.41,69.21 23.5,69.21 26.04,71.75 IC9.P$13
S$53
  Bottom 1.016: IC10.P$8 13.34,59.05 15.88,61.59 26.04,61.59 28.57,64.13 IC10.P$1
S$54
  Bottom 1.016: IC7.P$7 E$27.P$1 E$28.P$1
S$55
  Bottom 1.016: IC7.P$6 19.68,45.08 E$26.P$1
S$56
  Bottom 1.016: IC7.P$9 13.34,36.19 15.24,38.1 21.59,38.1 23.5,36.19 IC7.P$13
S$57
  Bottom 1.016: IC7.P$8 13.34,41.27 14.61,40 29.84,40 31.11,41.27 IC7.P$1
S$58
  Bottom 1.016: IC7.P$14 E$30.P$1
S$59
  Bottom 1.016: IC7.P$15 E$31.P$1 E$32.P$1
S$60
  Bottom 1.524: E$35.P$1 E$53.P$1
S$61
  Bottom 1.778: E$44.P$1 E$45.P$1 E$46.P$1 E$44.P$1
S$62
  Bottom 1.778: E$41.P$1 E$40.P$1
S$65
  Top 0.813: E$149.P$1 82.55,116.2 78.11,120.65 75.56,120.65 74.3,119.38 E$9.P$2
  Top 1.27: E$150.P$1 140.34,94.61 130.81,104.14 108.58,104.14 106.68,106.04 102.23,106.04 98.42,109.85 98.42,110.49 | IC4.P$12 98.42,110.49 | E$61.P$1 77.47,106.68 86.36,106.68 88.27,108.58 96.52,108.58 98.42,110.49 | E$60.P$1 58.42,99.69 56.52,97.79 56.52,90.8 IC19.P$9 55.88,85.09 55.88,76.2 IC18.P$9 | E$164.P$1 140.34,66.67 135.89,62.23 135.89,38.1 E$165.P$1
  Bottom 1.016: E$61.P$1 E$60.P$1 | IC11.P$5 160.66,31.11 154.31,37.46 E$165.P$1 | E$150.P$1 139.7,87.63 139.7,71.12 E$164.P$1
  Bottom 1.27: IC4.P$12 98.42,114.93 E$149.P$1 100.33,116.84 131.44,116.84 | 131.44,116.84 E$3.P$2 131.44,119.38 133.35,121.28 E$70.P$1 | IC3.P$2 159.38,117.47 158.12,116.2 132.08,116.2 131.44,116.84
S$66
  Bottom 1.016: IC4.P$10 93.34,109.85 94.61,108.58 109.86,108.58 114.3,113.03 120.02,113.03 121.28,111.76 E$3.P$9
S$67
  Bottom 1.778: E$3.P$8 E$168.P$1 J3.P$3
S$68
  Bottom 1.016: E$16.P$13 46.35,98.42 47.62,97.15 52.07,97.15 62.23,107.31 71.75,107.31 74.3,109.85 E$9.P$15
S$69
  Bottom 0.813: E$18.P$8 59.05,26.67 64.77,20.95 92.71,10.16 103.5,10.16 106.68,13.33 112.39,13.33 114.94,15.87 114.94,20.95 E$171.P$8
S$70
  Top 0.813: E$1.P$11 111.12,78.1 113.03,80.01 121.02,80.01 E$172.P$4
S$71
  Top 0.813: E$1.P$10 107.7,75.18 120.99,75.18 E$172.P$6
S$72
  Top 0.813: E$1.P$9 109.98,70.36 125.77,70.36 E$172.P$10
S$73
  Top 0.813: E$141.P$1 187.96,114.3 187.96,112.39 E$170.P$9
S$74
  Top 0.813: E$140.P$1 187.32,120.01 189.87,117.47 189.87,112.13 177.56,95.93 E$170.P$13
S$75
  Top 1.524: E$13.P$2 E$170.P$17
S$76
  Top 0.813: E$13.P$1 179.71,95.88 179.71,91.24 E$170.P$14
S$77
  Top 0.813: E$85.P$1 156.46,91.19 171.26,91.19 E$170.P$10
S$78
  Top 0.813: E$89.P$1 154.94,79.37 158.37,82.8 171.26,82.8 E$170.P$11
  Bottom 1.778: E$170.P$15 E$170.P$11
S$79
  Top 0.813: E$162.P$1 195.45,69.98 195.45,111.83 E$13.P$3
  Bottom 1.016: E$142.P$1 189.23,114.93 191.77,117.47 194.94,117.47 197.49,114.93 E$13.P$3
S$80
  Bottom 0.813: E$10.P$6 61.59,51.43 66.04,55.88 88.27,55.88 93.98,50.16 108.58,50.16 114.94,43.81 114.94,38.73 E$171.P$20
S$81
  Bottom 0.813: E$10.P$4 66.67,51.43 69.85,54.61 87,54.61 93.34,48.26 107.95,48.26 112.34,43.86 E$171.P$24
S$82
  Bottom 0.813: E$10.P$2 71.75,51.43 73.03,52.7 85.72,52.7 92.08,46.35 106.68,46.35 110.24,42.8 110.24,33.91 112.2,31.94 E$171.P$16
S$83
  Bottom 0.813: E$10.P$10 64.14,43.81 66.67,46.35 82.55,46.35 92.76,36.14 E$171.P$17
S$84
  Bottom 0.813: E$10.P$12 69.22,43.81 70.48,45.08 81.28,45.08 94.42,31.94 E$171.P$13
S$85
  Bottom 0.813: E$10.P$8 59.05,43.81 62.87,47.62 83.82,47.62 91.1,40.34 E$171.P$21
S$86
  Bottom 0.813: IC15.P$1 170.81,18.41 163.83,18.41 160.66,15.24 IC12.P$6
S$87
  Bottom 0.813: E$18.P$6 61.59,36.19 65.41,40 83.82,40 96.08,27.74 E$171.P$9
S$88
  Bottom 0.813: E$18.P$4 66.67,36.19 69.22,38.73 81.28,38.73 96.47,23.54 E$171.P$5
S$89
  Bottom 0.813: E$18.P$2 71.75,36.19 73.03,37.46 79.38,37.46 97.5,19.34 E$171.P$1
S$90
  Bottom 0.813: E$18.P$10 64.14,26.67 67.94,22.86 93.98,12.06 102.87,12.06 106.05,15.24 110.49,15.24 112.34,17.09 E$171.P$4
S$91
  Bottom 0.813: E$18.P$12 69.22,26.67 71.12,24.76 94.61,13.97 102.23,13.97 105.41,17.14 109.86,17.14 110.24,17.53 110.24,25.64 E$171.P$12
S$92
  Top 1.016: E$57.P$1 E$56.P$1
  Bottom 1.016: 61.59,114.93 E$9.P$10 | E$9.P$7 61.59,114.93 | 61.59,114.93 55.88,114.93 53.98,113.03 53.98,108.58 50.16,104.77 41.91,104.77 38.73,101.6 E$16.P$10 E$57.P$1 | E$56.P$1 50.8,60.96 50.8,32.38 64.14,19.05 93.98,7.62 103.5,7.62 107.31,11.43 119.38,11.43 126.36,4.44 147.96,4.44 | IC6.P$1 147.96,12.06 147.96,4.44 | 147.96,4.44 174.62,4.44 180.34,10.16 180.34,25.4 IC15.P$2
S$93
  Bottom 1.016: IC11.P$6 158.12,28.57 160.66,26.03 163.19,26.03 165.74,23.49 IC11.P$12 IC11.P$13
S$94
  Bottom 1.016: IC11.P$4 IC11.P$3
S$95
  Bottom 1.016: CR1.P$6 CR1.P$12
S$96
  Bottom 1.016: IC13.P$6 E$116.P$1
S$97
  Bottom 1.27: IC1.P$6 E$136.P$1
S$98
  Bottom 1.016: E$114.P$1 IC14.P$5 182.25,48.89 180.97,50.16 168.28,50.16 167,48.89 IC13.P$5
  Bottom 1.27: E$113.P$1 E$114.P$1
S$99
  Bottom 1.27: IC14.P$6 E$154.P$1
S$100
  Bottom 1.016: E$108.P$1 E$104.P$1
  Bottom 1.778: E$105.P$1 E$104.P$1
S$101
  Bottom 1.778: E$111.P$1 E$112.P$1
S$102
  Bottom 1.016: CR1.P$5 CR1.P$11 210.19,32.38 203.84,32.38 194.94,23.49 190.5,23.49 183.76,16.75 E$169.P$7
S$103
  Bottom 1.016: CR1.P$8 CR1.P$2
  Bottom 1.524: E$169.P$5 E$169.P$6 200.03,12.06 CR1.P$2
S$104
  Bottom 1.016: CR1.P$1 CR1.P$7
  Bottom 1.524: E$169.P$9 199.15,16.26 CR1.P$1
S$105
  Bottom 1.016: CR1.P$4 CR1.P$10 207.01,30.48 204.47,30.48 194.31,20.32 191.77,20.32 187.96,16.51 E$169.P$8
S$106
  Bottom 1.524: CR1.P$16 E$158.P$1 E$159.P$1 211.46,61.59 E$139.P$1 211.46,66.67 E$160.P$1
S$107
  Bottom 2.032: E$157.P$1 CR1.P$13 203.15,42.94 | 203.15,42.94 201.32,43.3 | 201.32,43.3 E$156.P$1 E$157.P$1 | E$157.P$1 201.32,43.3 | E$157.P$1 203.15,42.94
S$109
  Bottom 1.27: IC1.P$7 E$135.P$1
  Bottom 1.778: E$137.P$1 E$135.P$1
S$110
  Bottom 1.778: E$170.P$18 183.32,89.09 193.04,79.37 193.04,66.67 196.85,62.86 E$134.P$1
S$111
  Bottom 1.778: E$131.P$1 E$132.P$1 E$133.P$1 IC14.P$1
S$112
  Bottom 1.778: E$126.P$1 E$123.P$1 E$127.P$1 IC13.P$1
S$113
  Bottom 1.778: E$119.P$1 E$120.P$1 167.64,68.58 E$170.P$12
S$114
  Top 1.524: E$39.P$1 E$38.P$1 E$37.P$1 14.61,17.14 | 14.61,17.14 10.16,21.59 10.16,58.42 12.7,60.96 12.7,62.23 10.16,64.77 10.16,96.52 14.61,100.96 28.57,100.96 33.66,95.88 50.16,95.88 57.78,103.5 80.01,103.5 87,96.52 115.57,96.52 118.75,93.34 125.09,93.34 127,95.25 133.35,95.25 E$144.P$1 | E$34.P$1 14.61,17.14
  Bottom 1.524: E$172.P$8 128.85,77.61
  Bottom 1.778: E$172.P$7 E$172.P$8 132.08,80.64 E$144.P$1 E$84.P$1 154.94,88.26 E$170.P$2 E$170.P$6
S$115
  Bottom 1.27: E$1.P$16 E$172.P$1
S$116
  Bottom 1.27: E$1.P$15 E$172.P$3
S$117
  Bottom 1.27: E$1.P$14 E$172.P$5
S$118
  Bottom 1.27: E$1.P$13 107.95,83.18 111.12,80.01 111.12,76.2 114.52,72.81 E$172.P$9
S$119
  Bottom 1.778: E$170.P$4 139.06,66.04 E$15.P$1
S$121
  Bottom 1.778: E$124.P$1 E$125.P$1 E$170.P$20
S$122
  Bottom 1.778: E$170.P$7 E$170.P$3 E$87.P$1
VCC
  Top 1.016: IC7.P$3 26.04,41.27 28.57,38.73 | 28.57,38.73 31.11,36.19 IC7.P$16 32.38,33.65 34.92,33.65 | 28.57,38.73 20.95,38.73 18.41,36.19 IC7.P$11 18.41,28.57 E$33.P$1 | IC15.P$8 E$153.P$1 | IC1.P$16 214,95.88 212.72,94.61 212.72,83.18 | 212.72,83.18 212.72,76.83 216.53,73.02 E$138.P$1 | E$9.P$1 76.83,113.66 | IC1.P$11 212.72,83.18
  Top 1.27: IC8.P$14 31.11,88.26 E$20.P$1 | IC9.P$14 31.11,73.02 E$22.P$1 | IC10.P$14 31.11,57.78 E$24.P$1 | E$10.P$14 79.38,42.54 | E$2.P$14 79.38,57.78 | RP2.P$16 95.25,93.98 103.5,93.98 | E$9.P$16 76.83,113.66 | IC4.P$11 95.89,113.66 | IC4.P$15 106.05,113.66 | IC3.P$1 161.93,113.66 IC3.P$16 | IC3.P$3 156.84,113.66 | IC4.P$16 108.58,113.66 | IC3.P$4 154.31,113.66 | IC3.P$5 151.76,113.66 | IC3.P$7 146.69,113.66 IC3.P$10
  Top 1.524: 31.11,88.26 31.11,73.02 31.11,57.78 31.11,54.61 32.38,51.43 | E$54.P$1 39.37,18.41 34.92,22.86 34.92,33.65 34.92,45.08 32.38,51.43 | E$29.P$1 32.38,51.43 | IC19.P$16 76.83,85.72 80.01,82.55 80.01,80.64 77.47,78.1 69.85,78.1 66.67,74.93 IC18.P$12 66.67,71.75 67.94,70.48 76.83,70.48 IC18.P$16 | E$16.P$14 53.98,104.77 53.98,109.85 57.78,113.66 76.83,113.66 80.64,113.66 | E$95.P$1 80.64,113.66 | 80.64,113.66 84.45,113.66 | E$96.P$1 84.45,113.66 | 84.45,113.66 95.89,113.66 106.05,113.66 108.58,113.66 113.67,113.66 | E$69.P$1 E$68.P$1 113.67,113.66 | 113.67,113.66 E$83.P$1 146.69,113.66 151.76,113.66 154.31,113.66 156.84,113.66 161.93,113.66 164.47,113.66 165.74,112.39 165.74,109.85 E$80.P$1 E$81.P$1
  Top 1.778: E$153.P$1 E$152.P$1 191.77,41.91 191.77,50.8
  Top 2.54: E$167.P$1 106.05,53.34 | 79.38,67.94 79.38,57.78 E$93.P$1 79.38,42.54 E$91.P$1 | E$14.P$1 116.2,46.99
  Bottom 1.016: E$18.P$14 E$91.P$1
  pour Top (no thermals): 34.92,35.56 38.1,32.38 48.26,32.38 57.78,24.76 86.36,24.76 88.9,28.15 88.9,47.62 90.81,49.53 108.58,57.15 111.76,53.34 121.28,45.08 95.89,45.08 93.96,43.16 94.59,26.16 88.9,19.05 55.88,19.05 46.35,26.67 38.1,26.67 34.92,23.49
  pour Top (no thermals): 101.6,94.61 104.14,94.61 105.41,93.34 105.41,69.21 109.22,65.4 128.91,65.4 130.18,66.67 130.18,73.02 131.44,74.29 146.05,83.82 147.96,97.15 154.94,104.14 156.21,104.14 157.48,102.87 157.48,101.6 151.76,95.88 149.22,82.55 147.96,81.28 146.05,80.01 146.05,74.93 151.13,67.31 151.13,59.05 156.84,53.34 189.23,53.34 195.58,52.07 203.84,55.88 203.84,66.67 212.72,77.47 217.81,73.84 217.81,72.39 212.21,72.39 207.01,66.04 207.01,55.24 205.74,53.97 195.58,49.53 191.13,44.45 189.23,50.16 151.13,49.53 151.13,29.84 154.94,26.03 147.96,25.4 147.96,66.04 142.88,73.66 136.53,73.66 133.35,71.75 133.35,64.77 130.18,61.59 109.86,61.59 104.14,56.51 100.97,64.13 78.74,64.13 78.74,66.67 74.3,71.12 79.38,71.12 80.64,69.85 101.6,69.85

## Text on the board
tNames: PIELTEX 2021 / TEPETZINGO